# Altium PCB Layout.PcbDoc
Units mil, origin at the board's own origin, x right, y up, seen from the top; angles counter-clockwise.
Board outline 3937.01 x 2362.2 mil, 2 copper layers (Top Layer, Bottom Layer); 106 components, 66 nets, 304 pads, 82 vias.
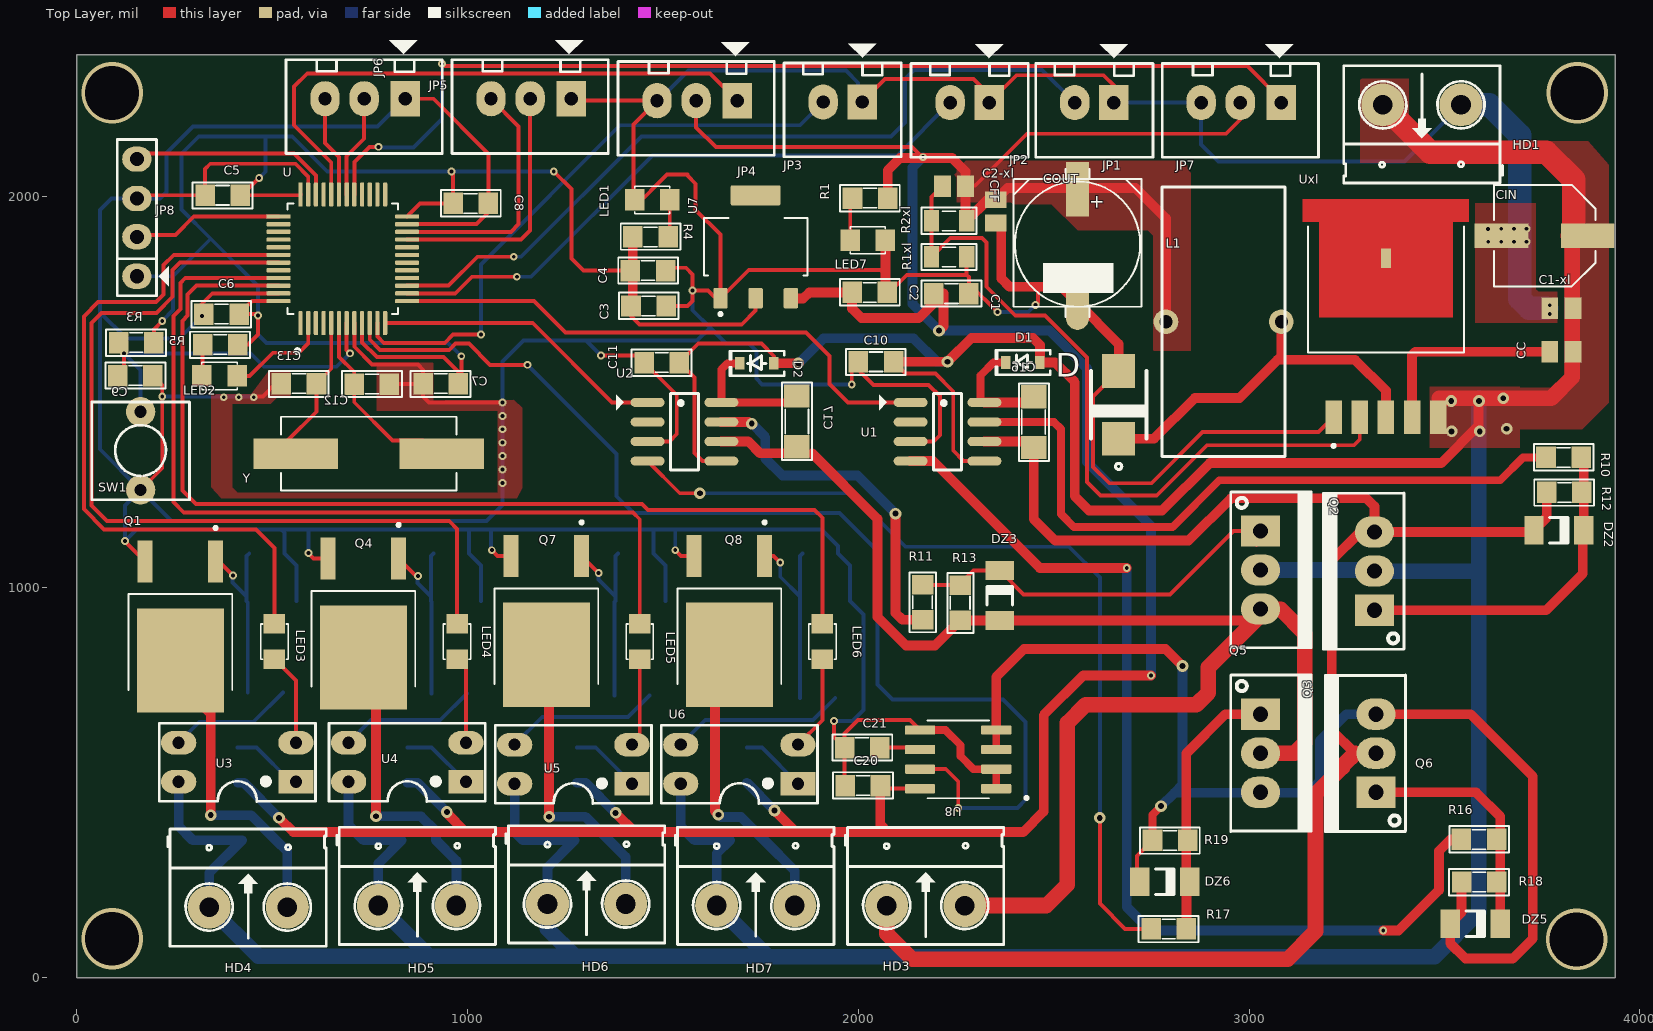
[diagram p0: Top Layer view]
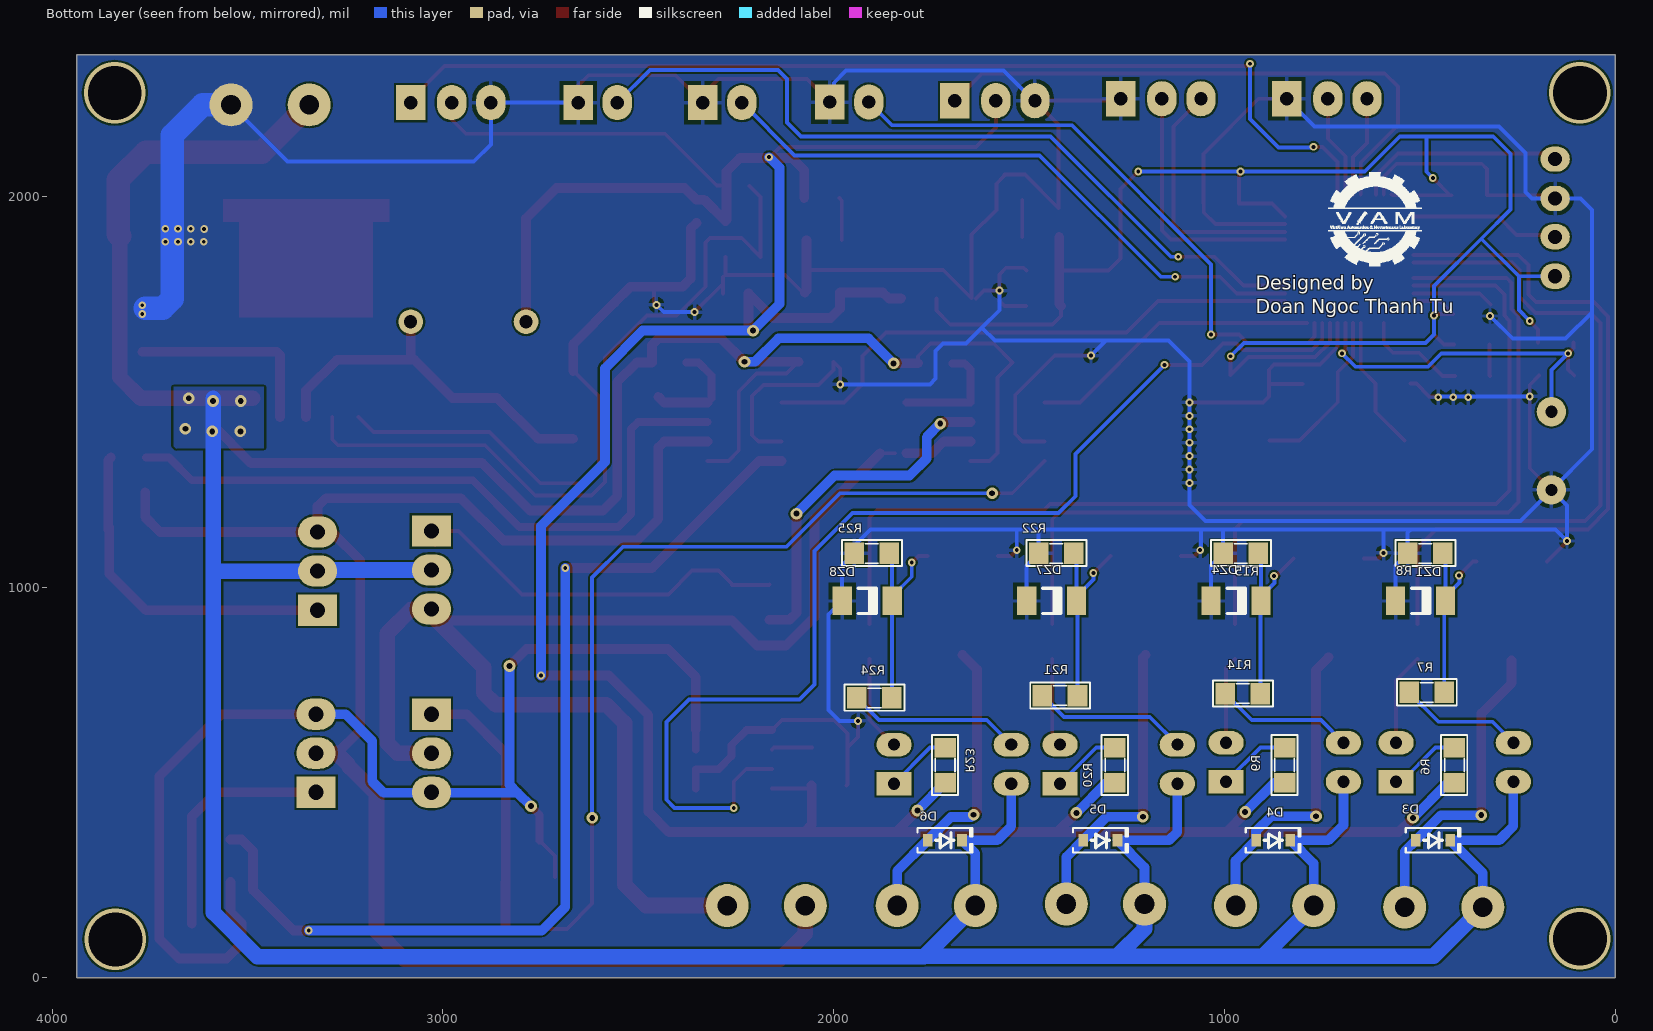
[diagram p1: Bottom Layer view, seen from below]
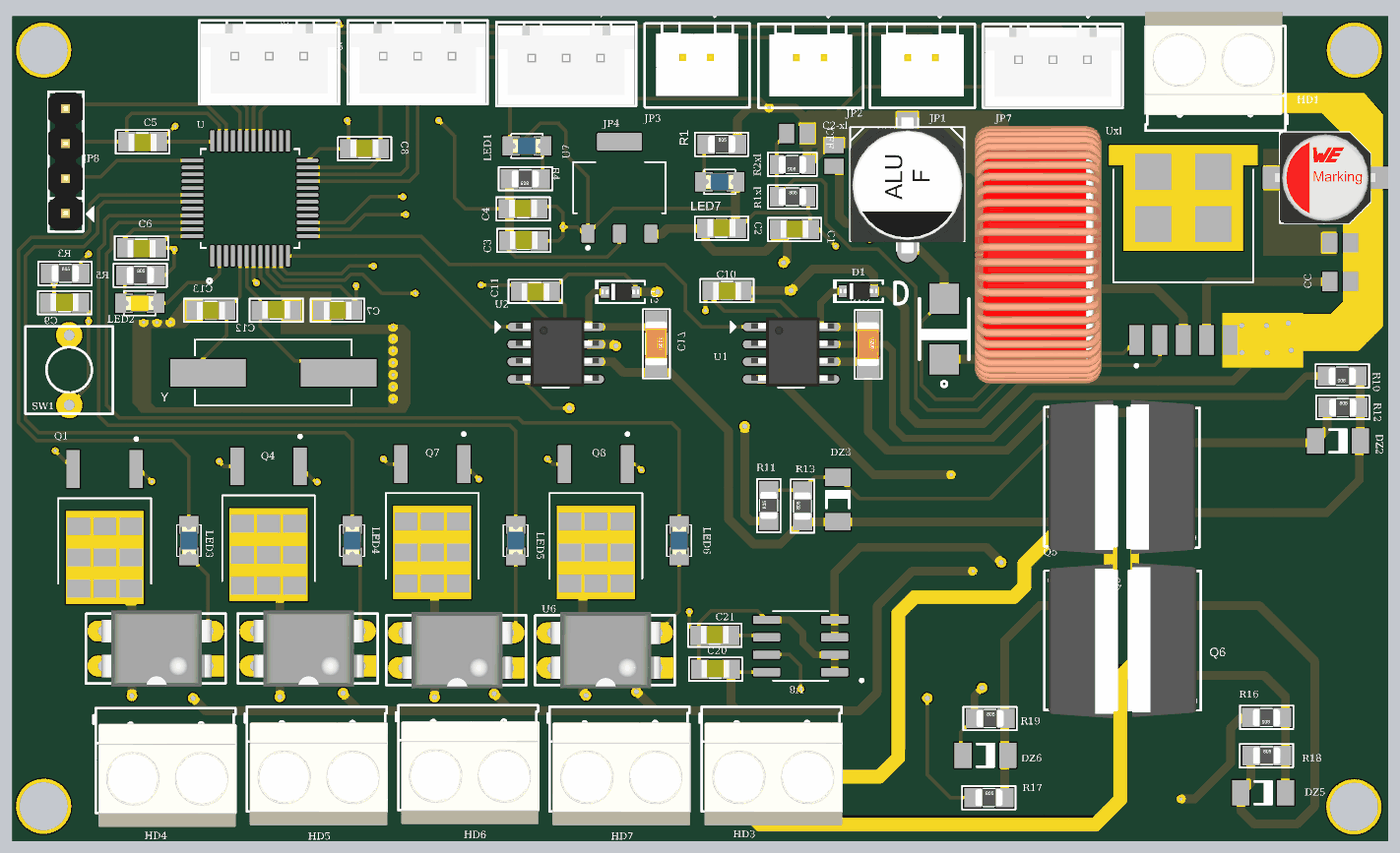
[diagram p2: 3D render of the assembled board from above, using the file's embedded part models]
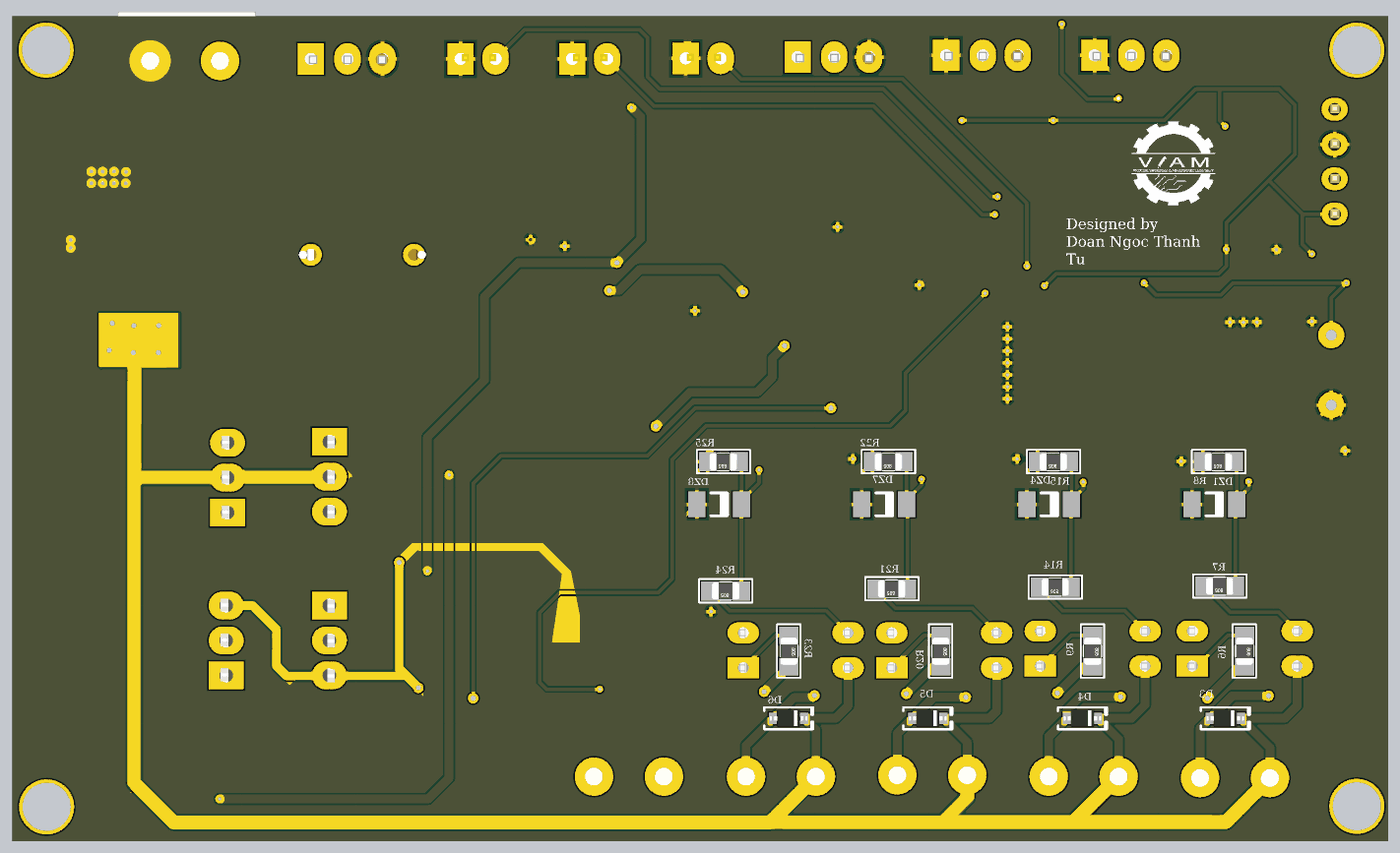
[diagram p3: 3D render of the assembled board from below, using the file's embedded part models]

## Layer stack, top to bottom
Top Solder: solder mask 0.4, Solder Resist, Dk 3.5
Top Layer: signal copper 1.4
Dielectric 1: dielectric 12.6, FR-4, Dk 4.8
Bottom Layer: signal copper 1.4
Bottom Solder: solder mask 0.4, Solder Resist, Dk 3.5

## Board outline
0,0 0,2362.2 3937.01,2362.2 3937.01,0

## Design rules (kind name [scope] priority, off if disabled: settings)
Clearance [All] p1: gap=5 ignorepadtopadclearanceinfootprint=TRUE
DiffPairsRouting [All] p1: maxlimit=10 minlimit=10 mostfreqgap=10 toplayer_minwidth=15 toplayer_maxwidth=15 toplayer_prefwidth=15 bottomlayer_minwidth=15 bottomlayer_maxwidth=15 bottomlayer_prefwidth=15 substack1={FB8EBCBD-66C1-4FBB-A9E1-B06849E95094} toplayer_{fb8ebcbd-66c1-4fbb-a9e1-b06849e95094}_minwidth=15 toplayer_{fb8ebcbd-66c1-4fbb-a9e1-b06849e95094}_maxwidth=15 toplayer_{fb8ebcbd-66c1-4fbb-a9e1-b06849e95094}_prefwidth=15 bottomlayer_{fb8ebcbd-66c1-4fbb-a9e1-b06849e95094}_minwidth=15 bottomlayer_{fb8ebcbd-66c1-4fbb-a9e1-b06849e95094}_maxwidth=15 bottomlayer_{fb8ebcbd-66c1-4fbb-a9e1-b06849e95094}_prefwidth=15 maxuncoupledlength=500
PolygonConnect PolygonConnect_11 [All vs IsNamedPolygon('5V_L01_P040')] p1: connectstyle=Direct reliefconductorwidth=10 reliefentries=4 polygonreliefangle="90 Angle" airgapwidth=10
PolygonConnect PolygonConnect_10 [All vs IsNamedPolygon('12V_L01_P038')] p2: connectstyle=Direct reliefconductorwidth=10 reliefentries=4 polygonreliefangle="90 Angle" airgapwidth=10
PolygonConnect PolygonConnect_9 [All vs IsNamedPolygon('GND_L01_P034')] p3: connectstyle=Direct reliefconductorwidth=10 reliefentries=4 polygonreliefangle="90 Angle" airgapwidth=10
PolygonConnect PolygonConnect_8 [All vs IsNamedPolygon('GND_L01_P030')] p4: connectstyle=Direct reliefconductorwidth=10 reliefentries=4 polygonreliefangle="90 Angle" airgapwidth=10
PolygonConnect PolygonConnect_7 [All vs IsNamedPolygon('GND_L01_P024')] p5: connectstyle=Direct reliefconductorwidth=10 reliefentries=4 polygonreliefangle="90 Angle" airgapwidth=10
PolygonConnect PolygonConnect_6 [All vs IsNamedPolygon('GND_L02_P022')] p6: connectstyle=Direct reliefconductorwidth=10 reliefentries=4 polygonreliefangle="90 Angle" airgapwidth=10
PolygonConnect PolygonConnect_5 [All vs IsNamedPolygon('12V_L01_P020')] p7: connectstyle=Direct reliefconductorwidth=10 reliefentries=4 polygonreliefangle="90 Angle" airgapwidth=10
PolygonConnect PolygonConnect_4 [All vs IsNamedPolygon('12V_L01_P020')] p8: thpad.connectstyle=Direct thpad.reliefconductorwidth=10 thpad.reliefentries=4 thpad.polygonreliefangle="90 Angle" thpad.airgapwidth=10 smdpad.connectstyle=Relief smdpad.reliefconductorwidth=10 smdpad.reliefentries=4 smdpad.polygonreliefangle="90 Angle" smdpad.airgapwidth=10 via.connectstyle=Relief via.reliefconductorwidth=10 via.reliefentries=4 via.polygonreliefangle="90 Angle" via.airgapwidth=10
PolygonConnect PolygonConnect_3 [All vs IsNamedPolygon('12V_L02_P018')] p9: connectstyle=Direct reliefconductorwidth=10 reliefentries=4 polygonreliefangle="90 Angle" airgapwidth=10
PolygonConnect PolygonConnect_2 [All vs IsNamedPolygon('12V_L01_P016')] p10: connectstyle=Direct reliefconductorwidth=10 reliefentries=4 polygonreliefangle="90 Angle" airgapwidth=10
PolygonConnect PolygonConnect_1 [All vs IsNamedPolygon('12V_L02_P014')] p11: thpad.connectstyle=Direct thpad.reliefconductorwidth=10 thpad.reliefentries=4 thpad.polygonreliefangle="90 Angle" thpad.airgapwidth=10 smdpad.connectstyle=Relief smdpad.reliefconductorwidth=10 smdpad.reliefentries=4 smdpad.polygonreliefangle="90 Angle" smdpad.airgapwidth=10 via.connectstyle=Relief via.reliefconductorwidth=10 via.reliefentries=4 via.polygonreliefangle="90 Angle" via.airgapwidth=10
PolygonConnect [All] p12: connectstyle=Relief reliefconductorwidth=10 reliefentries=4 polygonreliefangle="90 Angle" airgapwidth=10
RoutingVias [All] p1: holewidth=28 width=50 viastyle="Through Hole" minholewidth=28 minwidth=50 maxholewidth=28 maxwidth=50
SolderMaskExpansion [All] p1: expansion=4 istentingtop=FALSE
Width [All] p1: maxlimit=60 minlimit=10 preferedwidth=25 substack1={FB8EBCBD-66C1-4FBB-A9E1-B06849E95094} minimp=50.000000 maximp=50.000000 favimp=50.000000
29 further rules are at their usual default settings.

## Classes and differential pairs
component class XL4015: C1-xl C2-xl CC CFF CIN COUT D L1 LED7 R1 R1xl R2xl Uxl
component class Peripheral: C10 C11 C16 C17 C20 C21 D1 D2 D3 D4 D5 D6 DZ1 DZ2 DZ3 DZ4 DZ5 DZ6 DZ7 DZ8 HD3 HD4 HD5 HD6 HD7 JP1 JP2 JP3 JP4 JP5 JP6 JP7 LED3 LED4 LED5 LED6 Q1 Q2 Q3 Q4 Q5 Q6 Q7 Q8 R6 R7 R8 R9 R10 R11 R12 R13 R14 R15 R16 R17 R18 R19 R20 R21 R22 R23 R24 R25 U1 U2 U3 U4 U5 U6 U8
component class Microcontroller: C1 C2 C3 C4 C5 C6 C7 C8 C9 C12 C13 HD1 JP8 LED1 LED2 R3 R4 R5 SW1 U U7 Y

## Components (designator, comment, footprint, x,y, rotation, side; value= is the part's Value field where it differs from the comment)
C1 "10uF" SM-0805 2238.19,1750.96 r180 top value=103
C1-xl "105" C0805 3799.21,1713.58 r0 top value=33p
C2 "100nF" SM-0805 2029.11,1754.3 r180 top value=103
C2-xl "105" C0805 2351.38,1961.95 r90 top value=33p
C3 "10uF" SM-0805 1463.27,1719.49 r180 top value=103
C4 "100nF" SM-0805 1461.62,1810.04 r180 top value=103
C5 "100nF" SM-0805 373.03,2002.95 r0 top value=103
C6 "100nF" SM-0805 370.08,1698.82 r0 top value=103
C7 "100nF" SM-0805 931.14,1520.67 r0 top value=103
C8 "100nF" SM-0805 1007.87,1982.09 r180 top value=103
C9 "100nF" SM-0805 149.61,1541.31 r180 top value=103
C10 "10uF" SM-0805 2045.28,1576.77 r0 top value=103
C11 "10uF" SM-0805 1497.05,1574.81 r0 top value=103
C12 "12pF" SM-0805 754.96,1519.68 r180 top value=103
C13 "12pF" SM-0805 568.31,1520.67 r0 top value=103
C16 "22uF" SM-Cap-1206 2448.82,1487.28 r270 top value=10uF/50V
C17 "22uF" SM-Cap-1206 1842.52,1489.17 r270 top value=10uF/50V
C20 "100nF" SM-0805 2011.81,492.13 r180 top value=0.1uF
C21 "1nF" SM-0805 2009.84,589.29 r180 top value=103
CC "105" C0805 3799.21,1602.36 r0 top value=33p
CFF "33nF" C0805 2245.08,2026.55 r0 top value=33p
CIN "220uF" CAP-ALU-SMD-6.3x7.7x2.2 3756.89,1899.61 r180 top
COUT "330uF/25V" CAP-ALU-SMD-F 2561.02,1877.95 r270 top
D "SS54B" DIOM4336X244N 2666.34,1466.54 r90 top
D1 "FR107" SOD323 2421.01,1574.8 r180 top
D2 "FR107" SOD323 1740.16,1572.68 r180 top
D3 "Diode" SOD323 466.13,352.13 r180 bottom
D4 "Diode" SOD323 875.03,352.13 r180 bottom
D5 "Diode" SOD323 1317.55,352.13 r180 bottom
D6 "Diode" SOD323 1715.46,352.13 r180 bottom
DZ1 "Zener 12V" SOD-80 497.85,964.57 r180 bottom
DZ2 "Zener 1/2W" SOD-80 3793.03,1145.74 r0 top
DZ3 "Zener 1/2W" SOD-80 2362.2,978.35 r90 top
DZ4 "Zener 1/2W" SOD-80 970.03,964.57 r180 bottom
DZ5 "Zener 1/2W" SOD-80 3579.02,138.78 r0 top
DZ6 "Zener 1/2W" SOD-80 2784.45,246.06 r0 top
DZ7 "Zener 1/2W" SOD-80 1442.2,964.57 r180 bottom
DZ8 "Zener 1/2W" SOD-80 1914.37,964.57 r180 bottom
HD1 "Header 2" HED2 3542.52,2234.25 r180 top
HD3 "Header 2" HED2 2072.51,185.04 r0 top
HD4 "Header 2" HED2 338.51,181.1 r0 top
HD5 "Header 2" HED2 771.51,185.08 r0 top
HD6 "Header 2" HED2 1204.51,188.98 r0 top
HD7 "Header 2" HED2 1637.51,185.08 r0 top
JP1 "JP2" CON2 2654.01,2240 r180 top value="Connector 2"
JP2 "JP2" CON2 2335,2240 r180 top value="Connector 2"
JP3 "JP2" CON2 2010,2241.42 r180 top value="Connector 2"
JP4 "JP3" CON3 1685,2245 r180 top value="Connector 3"
JP5 "JP3" CON3 1260,2250 r180 top value="Connector 3"
JP6 "JP3" CON3 835.24,2250 r180 top value="Connector 3"
JP7 "JP3" CON3 3077.6,2240 r180 top value="Connector 3"
JP8 "JP4" JP4 153.54,1895.63 r90 top value="Connector 4"
L1 "47uH/5A" L-DIP-M-18.5x8 2935.04,1679.13 r180 top
LED1 "LED SMD" SM-LED-0805-Blue 1517.4,1990.85 r180 top
LED2 "LED SMD" SM-LED-0805-Yellow 319.88,1540.35 r0 top
LED3 "LED SMD" SM-LED-0805-Blue 505.59,815.67 r90 top
LED4 "LED SMD" SM-LED-0805-Blue 973.09,815.67 r90 top
LED5 "LED SMD" SM-LED-0805-Blue 1440.58,815.67 r90 top
LED6 "LED SMD" SM-LED-0805-Blue 1908.07,815.67 r90 top
LED7 "LED SMD" SM-LED-0805-Blue 1979.33,1887.8 r0 top
Q1 "IPD025N06N" DPAK229P994X241-3N 264.96,899.33 r270 top
Q2 "IRF840" QTO-220 3029.53,1143.7 r270 top
Q3 "IRF840" QTO-220 3320.87,940.94 r90 top
Q4 "IPD025N06N" DPAK229P994X241-3N 733.36,907.2 r270 top
Q5 "IRF840" QTO-220 3029.53,674.8 r270 top
Q6 "IRF840" QTO-220 3324.8,474.8 r90 top
Q7 "IPD025N06N" DPAK229P994X241-3N 1201.76,913.78 r270 top
Q8 "IPD025N06N" DPAK229P994X241-3N 1670.16,913.78 r270 top
R1 "510R" SM-RES-0805 1985.11,1995.66 r0 top value="R1/4W - 1K"
R1xl "3.3k" RES-SMD-0805 2232.19,1845.15 r0 top
R2xl "10k" RES-SMD-0805 2232.19,1937.35 r180 top
R3 "10K" SM-RES-0805 106.85,1625.98 r0 top value="R1/4W - 1K"
R4 "510R" SM-RES-0805 1512.99,1896.49 r180 top value="R1/4W - 1K"
R5 "510R" SM-RES-0805 321.85,1620.56 r0 top value="R1/4W - 1K"
R6 "1k" SM-RES-0805 411.42,589.29 r270 bottom value="R1/4W - 1K"
R7 "10R" SM-RES-0805 437.28,730.32 r0 bottom value="R1/4W - 1K"
R8 "4K7" SM-RES-0805 441.06,1086.46 r0 bottom value="R1/4W - 1K"
R9 "1k" SM-RES-0805 845.81,589.29 r270 bottom value="R1/4W - 1K"
R10 "10R" SM-RES-0805 3850.12,1331.76 r180 top value="R1/4W - 1K"
R11 "10R" SM-RES-0805 2164.37,916.42 r90 top value="R1/4W - 1K"
R12 "4K7" SM-RES-0805 3762.09,1242.19 r0 top value="R1/4W - 1K"
R13 "4K7" SM-RES-0805 2260.83,914.92 r90 top value="R1/4W - 1K"
R14 "10R" SM-RES-0805 908.03,727.36 r0 bottom value="R1/4W - 1K"
R15 "4K7" SM-RES-0805 913.23,1086.46 r0 bottom value="R1/4W - 1K"
R16 "10R" SM-RES-0805 3633.59,354.34 r180 top value="R1/4W - 1K"
R17 "10R" SM-RES-0805 2749.57,125 r0 top value="R1/4W - 1K"
R18 "4K7" SM-RES-0805 3544.14,245.24 r0 top value="R1/4W - 1K"
R19 "4K7" SM-RES-0805 2752.95,351.59 r0 top value="R1/4W - 1K"
R20 "1k" SM-RES-0805 1280.19,589.29 r270 bottom value="R1/4W - 1K"
R21 "10R" SM-RES-0805 1375.98,722.44 r0 bottom value="R1/4W - 1K"
R22 "4K7" SM-RES-0805 1385.41,1086.46 r0 bottom value="R1/4W - 1K"
R23 "1k" SM-RES-0805 1714.57,589.29 r270 bottom value="R1/4W - 1K"
R24 "10R" SM-RES-0805 1850.94,716.54 r0 bottom value="R1/4W - 1K"
R25 "4K7" SM-RES-0805 1857.58,1086.46 r0 bottom value="R1/4W - 1K"
SW1 "SW" SW2 163.11,1448.82 r270 top value="SW chip 2 pin"
U "STM32F103C8T6" QFP50P900X900X160-48N 680.63,1840.35 r90 top
U1 "IR2184" SO-8 2228.35,1397.64 r0 top
U2 "IR2184" SO-8 1555.12,1397.64 r0 top
U3 "OPTO" DIP4/W0.3 560.51,501.77 r90 top
U4 "OPTO" DIP4/W0.3 995.51,501.77 r90 top
U5 "OPTO" DIP4/W0.3 1420.51,496.77 r90 top
U6 "OPTO" DIP4/W0.3 1845.51,496.77 r90 top
U7 "AMS1117-3.3" SOT229P700X180-4N 1737.2,1871.06 r0 top
U8 "ACS712ELCTR-05B-T" SOIC127P600X175-8N 2255.51,559.06 r180 top
Uxl "XL4015" CONV_XL4015 3350.39,1841.9 r90 top
Y "8 MHz" XTAL_ECS-120.003-18-5P-TR 747.05,1341.54 r180 top

## Footprints (in the part's own frame and the unit in brackets; to place one, negate y for a bottom-side part, rotate by r counter-clockwise, add the part's x,y. Pads: shape width x height; smd on the part's side, far side on the other; paste and mask are expansions set on the pad)
C0805 [mm] "Chip Capacitor, Body 2.0x1.3mm, IPC High Density"
  rect 1.1x1.4 smd: 1(-0.75,0) 2(0.75,0)
  body extent -1.1,-0.72 1.1,0.72, height 1.4
CAP-ALU-SMD-6.3x7.7x2.2 [mm]
  rect 3.5x1.6 smd: 1(-2.8,0) 2(2.8,0)
  silkscreen extent -3.3,-3.3 3.3,3.3, body extent -3.65,-3.3 3.65,3.3, height 7.65
CAP-ALU-SMD-F [mil]
  rect 140x59.06 smd: 1(-140,0)
  oval 140x59.06 smd: 2(150,0)
  silkscreen extent -192,-163 187,163, body extent -195,-163 195,163, height 402
CON2 [mil] "CON2"
  rect 75x90 hole 34: 1(0,0)
  oval 75x90 hole 34: 2(100,0)
  silkscreen extent -100,-150 200,140, body extent -68,-70 168,107, height 236
CON3 [mil] "CON 3"
  rect 75x90 hole 34: 1(-5,0)
  oval 75x90 hole 34: 2(100,0) 3(200,0)
  silkscreen extent -100,-150 300,140, body extent -95,-90 295,136, height 276
CONV_XL4015 [mm]
  rect 2.16x1.07 smd: 1(-10.335,3.4) 2(-10.335,1.7) 3(-10.335,0) 4(-10.335,-1.7) 5(-10.335,-3.4)
  rect 1.27x0.635 smd paste-2 mask+0: 3.1(0,0)
  Top Layer region: 3.835,-5.4 2.365,-5.4 2.365,-4.35 -3.835,-4.35 -3.835,4.35 2.365,4.35 2.365,5.4 3.835,5.4
  silkscreen extent -12.3,-5.08 2.05,5.08
DIOM4336X244N [mm]
  rect 2.2x2.15 smd: A(2.2,0) C(-2.2,0)
  silkscreen extent -4.2,-1.8 2.2,1.8
DIP4/W0.3 [mil] "4 PIN, W 300mil, Pin to pin 100mil"
  rect 60x90 hole 31: 1(0,0)
  oval 60x90 hole 31: 2(100,0) 3(100,300) 4(0,300)
  silkscreen extent -50,-50 150,350, body extent -59,-10 159,305, height 170
DPAK229P994X241-3N [mm]
  rect 2.74x0.97 smd: 1(-4.22,2.29) 3(-4.22,-2.29)
  rect 6.77x5.67 smd paste-4: TAB(2.21,0)
  silkscreen extent -6.5,-3.37 4.12,3.37
HED2 [mil] "Header 2, 2 pin, hight 300mil, Pin to Pin 200, Colour Green"
  round 110 hole 50: 1(0,0) 2(200,0)
  silkscreen extent -106,-100 300,200, body extent -92,-140 302,155, height 394
JP4 [mil] "Jumper 4"
  oval 65x75 hole 36: 1(-100,0) 2(1,0) 3(99,0) 4(200,0)
  silkscreen extent -150,-81 250,50, body extent -148,-48 248,50, height 323
L-DIP-M-18.5x8 [mm] "Body 17.5x8mm, 2 leads"
  round 1.6 hole 0.85: 1(-3.75,0) 2(3.75,0)
  silkscreen extent -4,-8.75 4,8.75, body extent -4.62,-9.37 4.62,9.37, height 19.35
QFP50P900X900X160-48N [mm]
  rrect50% 1.56x0.28 smd: 1(-4.18,2.75) 2(-4.18,2.25) 3(-4.18,1.75) 4(-4.18,1.25) 5(-4.18,0.75) 6(-4.18,0.25) 7(-4.18,-0.25) 8(-4.18,-0.75) 9(-4.18,-1.25) 10(-4.18,-1.75) 11(-4.18,-2.25) 12(-4.18,-2.75) 25(4.18,-2.75) 26(4.18,-2.25) 27(4.18,-1.75) 28(4.18,-1.25) 29(4.18,-0.75) 30(4.18,-0.25) 31(4.18,0.25) 32(4.18,0.75) 33(4.18,1.25) 34(4.18,1.75) 35(4.18,2.25) 36(4.18,2.75)
  rrect50% 0.28x1.56 smd: 13(-2.75,-4.18) 14(-2.25,-4.18) 15(-1.75,-4.18) 16(-1.25,-4.18) 17(-0.75,-4.18) 18(-0.25,-4.18) 19(0.25,-4.18) 20(0.75,-4.18) 21(1.25,-4.18) 22(1.75,-4.18) 23(2.25,-4.18) 24(2.75,-4.18) 37(2.75,4.18) 38(2.25,4.18) 39(1.75,4.18) 40(1.25,4.18) 41(0.75,4.18) 42(0.25,4.18) 43(-0.25,4.18) 44(-0.75,4.18) 45(-1.25,4.18) 46(-1.75,4.18) 47(-2.25,4.18) 48(-2.75,4.18)
  silkscreen extent -6.15,-3.6 3.6,3.6
QTO-220 [mil] "TO-220 - 1-2-3"
  rect 80x100 hole 39: 1(0,0)
  oval 80x100 hole 39: 2(100,0) 3(200,0)
  silkscreen extent -100,-76 300,130, body extent -119,-64 322,121, height 755
RES-SMD-0805 [mil]
  rect 39.37x55 smd: 1(-45,0) 2(45,0)
  silkscreen extent -70,-34 70,33, body extent -39,-25 39,25, height 31
SM-0805 [mil] "Compoment SMD 80x50mil"
  rect 50x55 smd: 1(-45,0) 2(45,0)
  silkscreen extent -77,-34 76,33, body extent -40,-27 40,23, height 24
SM-Cap-1206 [mil]
  rect 60x65 smd: 1(0,0) 2(130,0)
  silkscreen extent -34,-38 164,39, body extent 1,-31 127,31, height 40
SM-LED-0805-Blue [mil]
  rect 50x55 smd: 1(0,0) 2(90,0)
  silkscreen extent 0,-35 90,35, body extent 5,-25 85,25, height 43
SM-LED-0805-Yellow [mil]
  rect 50x55 smd: 1(0,0) 2(90,0)
  silkscreen extent 0,-35 90,35, body extent 5,-25 85,25, height 43
SM-RES-0805 [mil]
  rect 50x55 smd: 1(0,0) 2(90,0)
  silkscreen extent -32,-34 121,33, body extent 6,-25 84,25, height 31
SO-8 [mm] "8-Pin Small Outline Integrated Circuit 1.27 mm Pitch, IPC Medium Density"
  oval 2.2x0.6 smd: 1(-2.4,1.905) 2(-2.4,0.635) 3(-2.4,-0.635) 4(-2.4,-1.905) 5(2.4,-1.905) 6(2.4,-0.635) 7(2.4,0.635) 8(2.4,1.905)
  silkscreen extent -4.44,-2.5 0.9,2.5, body extent -2.89,-2.43 3.15,2.59, height 1.6
SOD323 [mm]
  rect 0.625x0.83 smd: 1(-1.112,0) 2(1.112,0)
  silkscreen extent -1.78,-0.8 1.78,0.8, body extent -1.36,-0.62 1.36,0.62, height 1.05
SOD-80 [mm] "MELF Diode, 2-Leads, Body 3.50x1.65mm, IPC Medium Density"
  rect 1.25x1.85 smd: 1(-1.625,0) 2(1.625,0)
  silkscreen extent -0.6,-0.82 0.6,0.83, body extent -1.85,-0.85 1.85,0.85, height 1.69
SOIC127P600X175-8N [mm]
  rrect25% 1.97x0.6 smd: 1(-2.475,1.905) 2(-2.475,0.635) 3(-2.475,-0.635) 4(-2.475,-1.905) 5(2.475,-1.905) 6(2.475,-0.635) 7(2.475,0.635) 8(2.475,1.905)
  silkscreen extent -4.54,-2.52 2,2.6
SOT229P700X180-4N [mm]
  rrect15% 0.93x1.31 smd: 1(-2.29,-3.345) 2(0,-3.345) 3(2.29,-3.345)
  rrect15% 3.24x1.31 smd: 4(0,3.345)
  silkscreen extent -3.36,-4.47 3.36,1.86
SW2 [mil] "SW button 2pin, 250x 250 mil"
  round 75 hole 31: 1(0,0) 2(200,0)
  silkscreen extent -25,-125 225,125
XTAL_ECS-120.003-18-5P-TR [mm]
  rect 5.5x2 smd: 1(-4.75,0) 2(4.75,0)
  silkscreen extent -5.7,-2.4 5.7,2.4

## Part data
C1 C2 C3 C4 C5 C6 C7 C8 C9 C10 C11 C12 C13 C21: library part CM, "Cap SMD"
C1-xl C2-xl CC CFF: library part CapSMD, "Capacitor", LatestRevisionDate=17-Jul-2002, LatestRevisionNote="Re-released for DXP Platform.", PackageReference=RAD-0.3, Published=8-Jun-2000, Publisher="Altium Limited"
C16 C17: library part CP1, "Cap P  0,1uF < 22uF , 16 - 50V", Description 1="10 => 220uF/6,3V/10V - 10uF => 100uF/16V", Description 2="0,1uF => 33uF/50V - 10uF => 22uF/63V", Description 3="0,47uF => 10uF/100V"
C20: library part CN2, "Cap np 104 => 105pF"
CIN COUT: library part CN-ALU-SMD, "Polarized Capacitor (Axial)", LatestRevisionDate=17-Jul-2002, LatestRevisionNote="Re-released for DXP Platform.", PackageReference=POLAR0.8, Published=8-Jun-2000, Publisher="Altium Limited"
D: "Diode Schottky 40V 5A Surface Mount SMBF", Package=None, Availability=Unavailable, MF=JCET, MP=SS54B, Price=None, SnapEDA_Link=https://www.snapeda.com/parts/SS54B/JCET/view-part/105689/?ref=snap
D1 D2 D3 D4 D5 D6: library part "Diode SMD"
DZ1 DZ2 DZ3 DZ4 DZ5 DZ6 DZ7 DZ8: library part "Zener SMD"
HD1 HD3 HD4 HD5 HD6 HD7: library part Hed2, "Header 2 (Green)"
JP1 JP2 JP3: library part Con2, "Connector 2"
JP4 JP5 JP6 JP7: library part Con3, "Connector 3"
JP8: library part Con4, "Connector 4"
L1: library part L-SMD-1, Inductance="1.0 μH", Manufacturer="Wurth Elektronik", partNo=78477010, ComponentLink1Description=Manufacturer, ComponentLink1URL=http://www.we-online.de, ComponentLink2Description=Datasheet, ComponentLink2URL=http://katalog.we-online.de/pbs/datasheet/78477010.pdf, Created by="Baojun Chen", Created Date=Nov.2015
LED1 LED2 LED3 LED4 LED5 LED6 LED7: library part LED-SMD-0805
Q1 Q4 Q7 Q8: "N-Channel 60V 90A _Tc_ 3W _Ta_, 167W _Tc_ Surface Mount PG-TO252-3", Package="TO-252-3 Infineon Technologies", Availability=Unavailable, MF="Infineon Technologies", MP=IPD025N06N, Price=None, SnapEDA_Link=https://www.snapeda.com/parts/IPD025N06N/Infineon%20Technologies/view-part/666018/?ref=snap
Q2 Q3 Q5 Q6: "MOSFET N - CHANNEL 500V - 0.75 - 8A - TO-220"
R1 R3 R4 R5 R6 R7 R8 R9 R10 R11 R12 R13 R14 R15 R16 R17 R18 R19 R20 R21 R22 R23 R24 R25: library part R, "Resistor 1/4W"
R1xl R2xl: library part Res-SMD, "Resistor", Manufacturer="Generic Components", Class=Passive, Published=08/06/2000, Publisher="Altium Hobart Technology Centre"
SW1: library part SW2, "Switch button 2 pin"
U: "ARMÂ® CortexÂ®-M3 STM32F1 Microcontroller IC 32-Bit 72MHz 64KB _64K x 8_ FLASH", Package="LQFP-48 STMicroelectronics", Availability=Unavailable, MF=STMicroelectronics, MP=STM32F103C8T6, Price=None, SnapEDA_Link=https://www.snapeda.com/parts/STM32F103C8T6/STMicroelectronics/view-part/52195/?ref=snap
U1 U2: "Half-Bridge Driver"
U7: "Sot223/Pkg 1-Amp 3.3-Volt Low Drop Out Voltage Regulatator", Package=None, Availability=Unavailable, MF="Advanced Monolithic Systems", MP=AMS1117-3.3, Price=None, SnapEDA_Link=https://www.snapeda.com/parts/AMS1117-3.3/Advanced%20Monolithic%20Systems/view-part/53450/?ref=snap
U8: "Current Sensor 5A 1 Channel Hall Effect, Open Loop Bidirectional 8-SOIC _0.154, 3.90mm Width_", Package="SOIC-8 Allegro MicroSystems LLC", Digi-Key_Part_Number=620-1189-1-ND, Digi-Key_Purchase_URL=https://www.digikey.in/product-detail/en/allegro-microsystems/ACS712ELCTR-05B-T/620-1189-1-ND/1284606?utm_source=snapeda&utm_medium=aggregator&utm_campaign=symbol, MF="Allegro MicroSystems LLC", MP=ACS712ELCTR-05B-T, SnapEDA_Link=https://www.snapeda.com/parts/ACS712ELCTR-05B-T/Allegro%20MicroSystems%20LLC/view-part/46765/?ref=snap
Uxl: "5A 180KHz 36V Buck DC to DC Converter", Package=Package, Availability=Unavailable, MF=XLSEMI, MP=XL4015, Price=None, SnapEDA_Link=https://www.snapeda.com/parts/XL4015/XLSEMI/view-part/4725363/?ref=snap
Y: library part ECS-120.003-18-5P-TR, Package="HC49/US ECS International", Availability=Unavailable, MF="ECS International", MP=ECS-120.003-18-5P-TR, Price=None, SnapEDA_Link=https://www.snapeda.com/parts/ECS-120.003-18-5P-TR/ECS%20International/view-part/2547635/?ref=snap

## Via types
v1: diameter 20, hole 10, Top Layer to Bottom Layer, 55 vias
v2: diameter 30, hole 15, Top Layer to Bottom Layer, 23 vias
v3: diameter 157.48, hole 137.8, Top Layer to Bottom Layer, 4 vias

## Nets (pads, with @x,y where several pads share a name; then routed paths per layer and width w, separated by ;. In a path a pad name is that pad's centre, name@x,y a point inside that pad or via, vN(x,y) a via of type N, cw(c..) or ccw(c..) an arc to the next point about the centre after c; other vN are vias at no path point)
3V3: C3.2 C4.2 C5.2 C6.2 C7.2 C8.2 JP8.1 R3.2 R4.2 R5.2 U7.2 U.9 U.24 U.36 U.48 | length 4706.3
  Top Layer w10: R3.2 196.85,1659.84 v1(218.5,1681.5) ; R5.2 437.91,1620.56 463.58,1646.23 v1(463.58,1694.88) 459.65,1698.82 C6.2 448.35,1732.09 U.48 ; C5.2 C5.2@422.24,2002.95 ; v1(466.54,2047.24) C5.2@422.24,2002.95 ; U.36 570.39,2002.95 C5.2@422.24,2002.95 ; U.9 729.84,1626.46 767.72,1588.58 938.7,1588.58 983.98,1543.31 v1(983.98,1590.83) ; U.24 878.66,1982.09 C8.2 962.87,2059.76 v1(958.66,2063.98) ; v1(1220.47,2063.98) 1265.75,2018.7 1265.75,1840.55 1296.26,1810.04 C4.2 ; C3.2 1418.27,1693.94 1439.96,1672.24 1701.77,1672.24 1737.2,1707.68 U7.2
  Top Layer w25: C3.2 1422.99,1724.21 R4.2
  Bottom Layer w10: JP8.1 246.42,1795.63 ; v1(218.5,1681.5) 246.42,1709.41 246.42,1795.63 ; v1(466.54,2047.24) 482.28,2062.99 482.28,2153.54 ; v1(983.98,1590.83) 949.8,1625 484.81,1625 463.58,1646.23 v1(463.58,1694.88) 463.58,1770.67 342.52,1891.73 ; v1(1220.47,2063.98) v1(958.66,2063.98) 640.75,2063.98 551.18,2153.54 482.28,2153.54 ; 246.42,1795.63 342.52,1891.73 ; 342.52,1891.73 267.72,1966.54 267.72,2109.25 312.01,2153.54 482.28,2153.54
5V: C1.2 C2-xl.2 C2.2 C20.1 CFF.2 COUT.1 JP4.2 JP7.2 L1.2 R1.2 R2xl.1 R6.2 R9.2 R20.2 R23.2 U7.3 U8.8 | length 8610.5
  Top Layer w10: JP4.2 1585,2176.81 1635.83,2125.98 2137.8,2125.98 v1@2165.35,2098.43 ; C20.1 2064.88,484.06 U8.8 ; CFF.2 2275.62,2027.56 2299.21,2027.56 2432.09,2160.43 2940.91,2160.43 2977.6,2197.12 JP7.2
  Top Layer w25: v2(517.54,409.45) 553.96,373.03 995.08,373.03 ; v2(946.85,424.21) 946.85,421.26 995.08,373.03 ; v2(1378.94,422.24) 1428.15,373.03 ; v2(1785.72,428.15) 1840.83,373.03 ; U7.3 1828.35,1738.39 1858.66,1738.39 1874.58,1754.3 C2.2 1984.11,1712.74 2007.87,1688.98 2154.8,1688.98 2217.8,1751.97 2217.8,1667.6 v2(2206.69,1656.5) ; C20.1 2056.1,491.42 2056.1,391.73 2074.8,373.03 ; R1.2 2075.11,2066.52 2107.01,2098.43 2165.35,2098.43 2240.16,2098.43 2274.61,2063.97 CFF.2 2274.61,1939.94 R2xl.1 2331.32,1991.48 C2-xl.2 2381.55,2021.65 2709.65,2021.65 2787.4,1943.9 L1.2 ; v1(2749.02,773.62) 2575.79,773.62 2474.41,672.24 2474.41,425.2 2422.24,373.03 2074.8,373.03 ; 995.08,373.03 1428.15,373.03 ; 1428.15,373.03 1840.83,373.03 ; 1840.83,373.03 2074.8,373.03
  Bottom Layer w25: R6.2 427.69,499.29 v2(517.54,409.45) ; R9.2 871.77,499.29 v2(946.85,424.21) ; R20.2 1301.89,499.29 v2(1378.94,422.24) ; R23.2 v2(1785.72,428.15) ; v1(2165.35,2100.39) 2138.78,2073.82 2138.78,1724.41 v2(2206.69,1656.5) 2489.02,1656.5 2585.63,1559.88 2585.63,1319.88 2749.02,1156.5 v1(2749.02,773.62)
12V: C1-xl.2 C10.2 C11.2 CC.2 CIN.1 D1.1 D2.1 D3.2 D4.2 D5.2 D6.2 HD1.2 HD4.1 HD5.1 HD6.1 HD7.1 Q2.2 Q3.2 U1.5 U2.5 U3.4 U4.4 U5.4 U6.4 Uxl.5 | length 12656
  Top Layer w10: U2.5 1601.38,1322.64 1580.71,1343.31 1580.71,1536.14 C11.2 1590.27,1623.03 1751.81,1623.03 1783.96,1590.89 D2.1 ; C10.2 2120.79,1546.26 2197.83,1546.26 2243.11,1500.98 2243.11,1349.16 2269.63,1322.64 U1.5
  Top Layer w25: D2.1 v2(1846.61,1572.68) ; C10.2 v2(2228.5,1576.77) 2289.53,1637.8 2446.85,1637.8 2464.81,1619.84 D1.1 2503.94,1574.8 2554.13,1524.61 2554.13,1232.28 2590.55,1195.87 2777.56,1195.87 2899.61,1317.91 3492.13,1317.91 3587.6,1413.39 v2@3587.6,1483.27
  Top Layer w40: 3487.6,1483.27 3587.6,1483.27 v2(3650.59,1483.27) 3773.62,1483.27 3827.76,1537.4 CIN.1@3827.76,1899.61
  Top Layer w60: HD1.2 3463.58,2113.19 3760.83,2113.19 3831.69,2042.32 3831.69,1903.54 CIN.1@3827.76,1899.61
  Bottom Layer w25: U3.4 260.51,388.11 296.5,352.13 D3.2 338.51,268.3 HD4.1 ; U4.4 695.51,390.75 734.14,352.13 D4.2 771.51,292.41 HD5.1 ; U5.4 1120.51,372.97 1141.36,352.13 D5.2 1204.51,282.89 HD6.1 ; U6.4 1545.51,387.79 1581.18,352.13 D6.2 1637.51,317.97 HD7.1 ; v2(1846.61,1572.68) 1910.75,1636.81 2141.57,1636.81 2201.61,1576.77 v2(2228.5,1576.77)
  Bottom Layer w40: HD4.1 464.5,55.12 901.47,55.12 ; HD5.1 901.47,55.12 ; HD6.1 1204.51,125.21 1274.61,55.12 ; HD7.1 1767.47,55.12 ; Q2.2 3318.11,1043.7 Q3.2 3587.2,1040.94 3587.6,1041.34 ; v2@3587.6,1483.27 3587.6,1041.34 ; 901.47,55.12 1274.61,55.12 ; 1274.61,55.12 1767.47,55.12 ; 1767.47,55.12 1768.46,54.13 3474.68,54.13 3587.6,167.05 3587.6,1041.34
  other v2: 3518.7,1398.62 3590.55,1398.62 3659.45,1405.48 3517.78,1476.38 3588.7,1476.38
GND: C1-xl.1 C1.1 C2-xl.1 C2.1 C3.1 C4.1 C5.1 C6.1 C7.1 C8.1 C9.1 C10.1 C11.1 C12.1 C13.1 C20.2 C21.2 CIN.2 COUT.2 D.A DZ1.1 DZ4.1 DZ7.1 DZ8.1 HD1.1 JP1.1 JP2.1 JP3.1 JP4.3 JP5.1 JP6.1 JP7.3 JP8.3 LED1.2 LED7.2 Q1.3 Q4.3 Q7.3 Q8.3 R1xl.2 R8.2 R15.2 R22.2 R25.2 SW1.2 U1.3 U2.3 U7.1 U8.1 U8.2 U8.5 U.8 U.23 U.35 U.47 Uxl.1 | length 19680.1
  Top Layer w10: v1(123.03,1118.11) 123.03,1117.25 Q1.3 ; JP8.3 161.87,2002.95 C5.1 328.03,2070.43 341.26,2083.66 559.06,2083.66 592.04,2050.67 U.35 ; SW1.2 218.5,1304.21 v1(218.5,1488.19) 218.5,1517.42 C9.1 ; C6.1@318.19,1723.43 346.54,1751.77 U.47 ; v1@452.76,1488.19 476.38,1488.19 508.86,1520.67 C13.1 ; v1@592.52,1086.61 605.79,1073.35 Q4.3 ; U.8 710.15,1615.22 755.76,1569.61 872.87,1569.61 886.14,1556.34 C7.1 ; C12.1 885.16,1519.68 C7.1 ; JP6.1 912.4,2250 1053.78,2108.62 1053.78,1982.99 C8.1 1052.87,1958.66 1023.15,1928.94 U.23 ; v1(1062.01,1094.49) 1076.57,1079.92 Q7.3 ; v1@1087.8,1472.64 901.38,1472.64 886.14,1487.87 C7.1 ; JP5.1 1270,2245 JP4.3 1424.21,2184.21 1424.21,1969.63 1510.69,2056.1 1562.99,2056.1 1562.99,2053.15 1583.66,2032.48 1583.66,1965.55 1647.05,1902.17 U7.1 1719.68,1812.01 2056.76,1812.01 2069.33,1799.44 ; v1(1341.54,1592.52) 1434.33,1592.52 C11.1 1535.43,1491.42 1535.43,1391.73 1516.34,1372.64 U2.3 ; C4.1 1513.98,1817.41 1558.82,1817.41 1575.79,1800.44 v1(1575.79,1758.86) ; C3.1 1562.48,1719.49 1575.79,1732.8 v1(1575.79,1758.86) ; v1(1531.5,1094.49) 1546.06,1079.92 Q8.3 ; U7.1@1635.55,1738.39 1615.08,1758.86 v1(1575.79,1758.86) ; v1(1937.51,657.48) 1937.51,616.62 C21.2 ; C20.2 1964.84,494.09 C21.2 ; v1(1983.27,1518.7) 1983.27,1559.76 C10.1 2000.28,1555.83 2038.39,1517.72 2180.12,1517.72 2208.66,1489.17 2208.66,1388.78 2192.52,1372.64 U1.3 ; JP3.1 2068.78,2300.2 2294.8,2300.2 2335,2260 JP2.1 2405,2310 2627.99,2310 2654.01,2283.98 JP1.1 ; C2.1 2079.11,1754.3 2124.02,1799.21 2277.19,1799.21 ; U8.5 2132.68,659.45 1999.02,659.45 1964.84,625.28 C21.2 ; R1xl.2 2277.19,1799.21 ; C1.1 2283.19,1793.21 2277.19,1799.21 ; C1.1@2285.83,1773.94 v1(2356.02,1703.74) ; v1(2453.74,1722.44) 2459.65,1728.35 2459.65,1768.7 ; D.A 2600.63,1487.44 2600.63,1307.83 2642.72,1265.75 2750,1265.75 2880.91,1396.65 3178.18,1396.65 Uxl.1
  Top Layer w20: U8.5 2223.23,634.06 2261.81,595.47 2261.81,566.93 2294.68,534.06 U8.2 U8.1
  Top Layer w25: LED7.2 2069.33,1799.44 2069.33,1759.08 C2.1 ; C2-xl.1 2366.14,1917.66 2366.14,1789.37 2386.81,1768.7 2459.65,1768.7 2520.28,1768.7 COUT.2 2666.34,1622.64 D.A
  Bottom Layer w10: v1(218.5,1488.19) v1@452.76,1488.19 ; v1(320.16,1693.9) 262.09,1635.83 126.57,1635.83 59.06,1703.35 ; DZ1.1 561.83,1055.69 R8.2 531.06,1139.21 522.64,1147.64 ; v1(592.52,1087.6) 592.52,1147.64 ; JP6.1 769.54,2179.29 297.4,2179.29 229.33,2111.22 229.33,2011.17 212.8,1994.63 JP8.3 88.92,1994.63 59.06,1964.76 59.06,1703.35 ; DZ4.1 1034,1055.69 R15.2 1003.23,1144.97 1005.91,1147.64 ; v1(1062.01,1094.49) 1060.04,1096.46 1060.04,1147.64 ; v1(1341.54,1592.52) 1303.15,1630.91 ; JP4.3 1488.11,2245 1564.96,2321.85 1968.5,2321.85 1999.57,2290.79 1999.57,2251.85 JP3.1 ; DZ7.1 1506.17,1055.69 R22.2 1475.41,1146.67 1476.38,1147.64 ; v1(1531.5,1094.49) 1531.5,1147.64 ; v1(1575.79,1758.86) 1575.79,1708.66 1620,1664.45 ; v1(1937.51,657.48) 1985.24,657.48 2012.8,685.04 2012.8,930.12 DZ8.1 1978.35,1055.69 R25.2 1947.58,1105.57 1905.51,1147.64 1531.5,1147.64 ; v1(1983.27,1518.7) 1753.94,1518.7 1739.17,1533.46 1739.17,1604.33 1720.47,1623.03 1661.42,1623.03 1620,1664.45 ; v1(2356.02,1703.74) 2435.04,1703.74 v1(2453.74,1722.44) ; JP1.1 JP7.3 2877.6,2133.23 2921.26,2089.57 3397.83,2089.57 HD1.1 ; 59.06,1703.35 59.06,1352.87 SW1.2 ; SW1.2 242.64,1169.29 1048.23,1169.29 1089.57,1210.63 v1(1089.57,1266.73) v1(1089.57,1301.05) v1(1089.57,1335.37) v1(1089.57,1369.68) v1(1089.57,1404) v1(1089.57,1438.32) v1(1089.57,1472.64) 1089.57,1577.76 1142.72,1630.91 1303.15,1630.91 ; SW1.2 123.03,1208.74 v1(123.03,1118.11) 152.56,1147.64 522.64,1147.64 ; 522.64,1147.64 592.52,1147.64 ; 592.52,1147.64 1005.91,1147.64 ; 1005.91,1147.64 1060.04,1147.64 ; 1060.04,1147.64 1476.38,1147.64 ; 1303.15,1630.91 1587.6,1630.91 1620,1663.31 1620,1664.45 ; 1476.38,1147.64 1531.5,1147.64
  Bottom Layer w60: HD1.1 3615.16,2234.25 3692.91,2156.5 3692.91,1737.76 3717.09,1713.58 3761.81,1713.58
  other v1: 375.98,1485.95 414.37,1485.95 452.76,1485.95 3769.69,1698.82 3769.69,1721.46 3612.2,1883.86 3645.67,1883.86 3678.15,1883.86 3710.63,1883.86 3611.22,1916.34 3645.67,1917.32 3678.15,1917.32 3710.63,1917.32
GND_MOTOR: DZ5.1 DZ6.1 Q5.3 Q6.3 R18.1 R19.1 U8.3 U8.4 | length 3258.6
  Top Layer w10: DZ6.1@2713.58,257.87 2713.58,312.22 R19.1
  Top Layer w20: U8.3 U8.4 ; R19.1 2752.95,417.32 v2@2774.61,438.98
  Top Layer w25: U8.4 2352.95,770.28 2424.21,841.54 2786.42,841.54 v2(2829.72,798.23) ; Q6.3 3567.32,674.8 3726.38,515.75 3726.38,100.39 3675.2,49.21 3554.13,49.21 3515.04,88.3 DZ5.1 3544.14,167.88 R18.1
  Bottom Layer w25: v2(2775,439.37) 2809.06,473.43 ; v2(2829.72,798.23) 2829.72,494.09 2809.06,473.43 ; Q6.3 3249.61,674.8 3181.1,606.3 3181.1,502.95 3151.57,473.43 2809.06,473.43
NetC9_2: C9.2 R3.1 SW1.1 U.7 | length 951.9
  Top Layer w10: C9.2 120.08,1556.78 v1(120.08,1598.43) 106.85,1611.65 R3.1 ; U.7 690.47,1606.62 v1(698.66,1598.43)
  Bottom Layer w10: SW1.1 163.11,1555.39 v1(120.08,1598.43) 444.88,1598.43 479.33,1563.98 664.21,1563.98 v1(698.66,1598.43)
NetC12_2: C12.2 U.6 Y.1 | length 434.7
  Top Layer w10: U.6 670.78,1589.34 709.96,1550.16 C12.2 709.96,1473.11 808.07,1375 Y.1@885.12,1375
NetC13_2: C13.2 U.5 Y.2 | length 347.1
  Top Layer w10: Y.2@539.37,1375 613.31,1448.94 C13.2 613.31,1521.07 651.1,1558.85 U.5
NetC16_1: C16.1 D1.2 U1.8 | length 283.1
  Top Layer w10: U1.8@2313.06,1482.41 U1.8
  Top Layer w20: U1.8@2313.06,1482.41 2313.06,1541.9 2345.96,1574.8 D1.2
  Top Layer w25: U1.8 2434.17,1472.64 C16.1
NetC16_2: C16.2 DZ2.1 HD3.1 Q3.3 Q6.2 R12.1 U1.6 | length 4276.7
  Top Layer w25: U1.6 2433.46,1372.64 C16.2 2448.82,1174.21 2503.94,1119.09 2845.36,1119.09 2953.53,1227.26 3300.3,1227.26 3320.87,1206.69 Q3.3 ; Q6.2 3271.65,574.8 3211.61,634.84 3211.61,1067.91 3284.65,1140.94 Q3.3 ; R12.1 3762.09,1178.77 DZ2.1 3724.27,1140.94 Q3.3
  Top Layer w40: HD3.1 2072.51,113.51 2138.78,47.24 3098.43,47.24 3170.28,119.09 3170.28,470.47 3239.17,539.37 ; 3242.62,545.77 3271.65,574.8
NetC17_1: C17.1 D2.2 U2.8 | length 301.4
  Top Layer w20: D2.2 1665.35,1572.68 1649.61,1556.93 U2.8 C17.1@1813.4,1472.64
NetC17_2: C17.2 DZ3.1 HD3.2 Q2.3 Q5.2 R13.1 U2.6 | length 3659.3
  Top Layer w10: C17.2@1843.5,1342.64 1881.44,1342.64 ; R13.1@2260.83,908.27 R13.1@2266.93,914.37
  Top Layer w25: U2.6 1718.52,1372.64 1748.52,1342.64 C17.2@1813.4,1342.64 ; 1881.44,1342.64 2049.21,1174.87 2049.21,923.23 2122.05,850.39 2196.3,850.39 R13.1 ; R13.1@2266.93,914.37 DZ3.1 3000.2,914.37 Q2.3 Q2.3@3029.53,928.15
  Top Layer w40: HD3.2 2481.3,185.04 2535.06,238.8 2535.06,652.19 2581.69,698.82 2865.16,698.82 2895.67,729.33 2895.67,794.29 Q2.3@3029.53,928.15 ; Q5.2 3116.61,574.8 3142.72,600.91 3142.72,881.89 3080.91,943.7 Q2.3
NetC21_1: C21.1 U8.6 | length 105.4
  Top Layer w10: C21.1 2152.83,589.29 U8.6
NetCC_1: CC.1 Uxl.4 | length 514.5
  Top Layer w25: Uxl.4 3417.32,1593.5 3426.18,1602.36 CC.1
NetCFF_1: CFF.1 R1xl.1 R2xl.2 Uxl.2 | length 1951.8
  Top Layer w10: CFF.1 2187.19,1998.19 R2xl.2 R1xl.1 2235.27,1893.23 2316.41,1893.23 2327.76,1881.89 2327.76,1768.7 2401.57,1694.88 2478.35,1694.88 2585.63,1587.6 2585.63,1268.94 2620.31,1234.25 2763.78,1234.25 2892.72,1363.19 3268.7,1363.19 3283.46,1377.95 Uxl.2
NetD3_1: D3.1 HD4.2 Q1.TAB | length 805
  Top Layer w25: Q1.TAB 264.96,753.74 342.52,676.18 v2(342.52,416.34)
  Bottom Layer w25: v2(342.52,416.34) 445.72,416.34 D3.1 538.51,323.55 HD4.2
NetD4_1: D4.1 HD5.2 Q4.TAB | length 801.2
  Top Layer w25: Q4.TAB 765.75,787.81 v2(765.75,413.39)
  Bottom Layer w25: v2(765.75,413.39) 880.91,413.39 918.83,375.46 D4.1 971.51,299.44 HD5.2
NetD5_1: D5.1 HD6.2 Q7.TAB | length 775.9
  Top Layer w25: Q7.TAB 1208.66,819.87 v2(1208.66,412.4)
  Bottom Layer w25: v2(1208.66,412.4) 1301.08,412.4 D5.1 1404.51,308.96 HD6.2
NetD6_1: D6.1 HD7.2 Q8.TAB | length 772.6
  Top Layer w25: v2(1641.73,417.32) 1632.87,426.18 1632.87,789.49 Q8.TAB
  Bottom Layer w25: v2(1641.73,417.32) 1647.64,411.42 1699.97,411.42 D6.1 1837.51,273.88 HD7.2
NetD_C: D.C L1.1 Uxl.3 | length 969.7
  Top Layer w25: D.C 2756.89,1379.92 2861.22,1484.25 2975.39,1484.25 3072.83,1581.69 ; L1.1 3082.68,1591.54 3072.83,1581.69 ; Uxl.3 3350.39,1502.95 3271.65,1581.69 3072.83,1581.69
NetDZ1_2: DZ1.2 Q1.1 R7.1 R8.1 | length 490.4
  Top Layer w10: Q1.1 363.5,1065.47 v1(399.45,1029.53)
  Bottom Layer w10: v1@398.62,1032.48 398.62,1011.63 DZ1.2@433.88,976.38 ; R7.1 437.28,961.16 DZ1.2 DZ1.2@433.88,976.38 ; R8.1 433.88,1079.28 DZ1.2@433.88,976.38
NetDZ2_2: DZ2.2 Q3.1 R10.1 R12.2 | length 879.2
  Top Layer w25: Q3.1 3760.83,940.94 3854.33,1034.45 DZ2.2@3854.33,1152.62 ; R10.1 3857.01,1324.87 DZ2.2
NetDZ3_2: DZ3.2 Q2.1 R11.2 R13.2 | length 1010.9
  Top Layer w10: R11.2 2165.87,1004.92 R13.2 ; R13.2@2259.33,1006.42 2295.24,1042.32 DZ3.2 2423.23,981.3 2798.23,981.3 2960.63,1143.7 Q2.1 ; Q2.1@2994.09,1133.86 Q2.1@3019.68,1108.27
NetDZ4_2: DZ4.2 Q4.1 R14.1 R15.1 | length 500
  Top Layer w10: Q4.1 868.32,1028.54 v1(872.87,1028.54)
  Bottom Layer w10: v1@872.05,1031.5 872.05,1010.38 DZ4.2@906.05,976.38 ; R14.1 908.03,962.59 DZ4.2 DZ4.2@906.05,976.38 ; R15.1 906.05,1079.28 DZ4.2@906.05,976.38
NetDZ5_2: DZ5.2 Q6.1 R16.1 R18.2 | length 618.1
  Top Layer w25: Q6.1 3581.3,474.8 3642.99,413.11 DZ5.2
NetDZ6_2: DZ6.2 Q5.1 R17.2 R19.2 | length 803.7
  Top Layer w20: R17.2 2842.95,128.39 DZ6.2@2842.95,246.06
  Top Layer w25: R17.2 2839.57,574.8 2939.57,674.8 Q5.1
NetDZ7_2: DZ7.2 Q7.1 R21.1 R22.1 | length 510.5
  Top Layer w10: Q7.1@1291.97,1079.92 v1(1335.47,1036.42)
  Bottom Layer w10: v1@1334.65,1039.37 1334.65,1019.95 DZ7.2@1378.22,976.38 ; R21.1 1375.98,962.33 DZ7.2 DZ7.2@1378.22,976.38 ; R22.1 1378.22,1079.28 DZ7.2@1378.22,976.38
NetDZ8_2: DZ8.2 Q8.1 R24.1 R25.1 | length 527.4
  Top Layer w10: Q8.1 1783.27,1079.92 v1(1800.2,1062.99)
  Bottom Layer w10: v1(1800.2,1062.99) 1800.2,1026.57 DZ8.2@1850.39,976.38 ; R24.1 1850.94,975.83 DZ8.2@1850.39,976.38 ; R25.1 1850.39,1079.28 DZ8.2@1850.39,976.38
NetJP1_2: JP1.2 U.15 | length 2037.5
  Top Layer w10: U.15 951.57,1771.46 1025.59,1845.47 v1(1118.11,1845.47)
  Bottom Layer w10: v1(1118.11,1845.47) 1136.81,1845.47 1444.88,2153.54 2083.66,2153.54 2119.09,2188.98 2119.09,2300.2 2142.72,2323.82 2470.19,2323.82 JP1.2
NetJP2_2: JP2.2 U.14 | length 1592
  Top Layer w10: U.14 968.31,1751.77 1010.83,1794.29 v1(1125.98,1794.29)
  Bottom Layer w10: v1(1125.98,1794.29) 1162.4,1794.29 1473.11,2105 2100,2105 JP2.2
NetJP3_2: JP3.2 U.11 | length 1542.4
  Top Layer w10: U.11 769.21,1641.23 785.43,1625 941.45,1625 963.1,1646.65 v1(1034,1646.65)
  Bottom Layer w10: v1(1034,1646.65) 1034,1825.93 1390.16,2182.09 1850.67,2182.09 JP3.2
NetJP4_1: JP4.1 U.32 | length 1492.7
  Top Layer w10: U.32 651.1,2087.09 556.1,2182.09 556.1,2281.5 589.61,2315 1620,2315 JP4.1
NetJP5_2: JP5.2 U.21 | length 661.5
  Top Layer w10: U.21 1136.61,1889.57 1160,1912.95 JP5.2
NetJP5_3: JP5.3 U.22 | length 644
  Top Layer w10: U.22 1111.02,1909.25 1130.71,1928.94 1130.71,2179.29 JP5.3
NetJP6_2: JP6.2 U.30 | length 263.6
  Top Layer w10: U.30 690.47,2102.73 735.24,2147.5 JP6.2
NetJP6_3: JP6.3 U.31 | length 259.8
  Top Layer w10: JP6.3 635.24,2136.74 670.78,2101.2 U.31
NetJP7_1: JP7.1 U.29 | length 2689.1
  Top Layer w10: U.29 710.15,2088.11 749.02,2126.97 v1(771.65,2126.97) ; v1@935.24,2340.55 942.13,2333.66 2996.06,2333.66 3082.6,2247.13 JP7.1
  Bottom Layer w10: v1(771.65,2126.97) 773.62,2125 861.22,2125 934.1,2197.88 v1(934.1,2339.57)
NetJP8_2: JP8.2 U.37 | length 384.1
  Top Layer w10: JP8.2 158.49,1901.57 251.97,1901.57 299.02,1948.62 U.37
NetJP8_4: JP8.4 U.34 | length 536.2
  Top Layer w10: JP8.4 167.91,2110 555.35,2110 611.73,2053.63 U.34
NetLED1_1: LED1.1 R4.1 | length 94.4
  Top Layer w10: R4.1@1517.4,1896.49 LED1.1
NetLED2_1: LED2.1 R5.1 | length 81
  Top Layer w10: LED2.1 321.85,1542.32 R5.1
NetLED2_2: LED2.2 U.2 | length 268.9
  Top Layer w10: LED2.2 442.08,1540.35 501.53,1599.81 568.31,1599.81 592.04,1623.54 U.2
NetLED3_1: LED3.1 U3.2 | length 236.6
  Top Layer w10: LED3.1 560.51,760.75 U3.2
NetLED3_2: LED3.2 U.42 | length 1824.8
  Top Layer w10: LED3.2 505.59,1100.43 458.39,1147.64 69.88,1147.64 17.72,1199.8 17.72,1692.91 54.13,1729.33 202.76,1729.33 222.04,1748.62 222.04,1824.41 247.83,1850.2 U.42
NetLED4_1: LED4.1 U4.2 | length 223.2
  Top Layer w10: LED4.1 995.51,793.24 U4.2
NetLED4_2: LED4.2 U.43 | length 2254.3
  Top Layer w10: U.43 263.58,1830.51 245.08,1812.01 245.08,1743.11 203.74,1701.77 62.99,1701.77 37.4,1676.18 37.4,1208.66 76.77,1169.29 953.03,1169.29 973.09,1149.24 LED4.2
NetLED5_1: LED5.1 U5.2 | length 227.2
  Top Layer w10: U5.2 1440.58,616.84 LED5.1
NetLED5_2: LED5.2 U.45 | length 2304.5
  Top Layer w10: U.45 277.36,1791.14 264.96,1778.74 264.96,1711.81 247.05,1693.9 247.05,1217.52 273.62,1190.94 1423.23,1190.94 1440.58,1173.59 LED5.2
NetLED6_1: LED6.1 U6.2 | length 244.8
  Top Layer w10: U6.2 1908.07,659.33 LED6.1
NetLED6_2: LED6.2 U.46 | length 2687.9
  Top Layer w10: U.46 305.91,1771.46 283.46,1749.02 283.46,1694.88 270.08,1681.5 270.08,1247.36 304.84,1212.6 1446.59,1212.6 1461.35,1197.83 1887.8,1197.83 1908.07,1177.56 LED6.2
NetLED7_1: LED7.1 R1.1 | length 110.3
  Top Layer w10: LED7.1 1979.33,1989.89 R1.1
NetR6_1: R6.1 U3.1 | length 185.3
  Bottom Layer w10: R6.1 459.92,589.29 547.44,501.77 U3.1
NetR7_2: R7.2 U3.3 | length 329.6
  Bottom Layer w10: U3.3 314.26,655.51 452.47,655.51 R7.2
  Bottom Layer w25: U3.3 U3.3@270.08,601.77
NetR9_1: R9.1 U4.1 | length 186
  Bottom Layer w10: R9.1 907.99,589.29 U4.1
NetR10_2: R10.2 U1.7 | length 1750
  Top Layer w20: U1.7 2500.59,1422.64 2518.7,1404.53 2518.7,1187.01 2552.17,1153.54 2804.13,1153.54 2924.21,1273.62 3643.2,1273.62 3701.34,1331.76 R10.2
NetR11_1: R11.1 U2.7 | length 905.3
  Top Layer w25: U2.7 1719.09,1422.64 1723.43,1418.31 v2(1727.36,1418.31) ; v2(2095.47,1187.99) 2095.47,933.83 2112.88,916.42 R11.1
  Bottom Layer w25: v2(1727.36,1418.31) 1761.81,1383.86 1761.81,1329.35 1805.73,1285.43 1998.03,1285.43 v2(2095.47,1187.99)
NetR14_2: R14.2 U4.3 | length 354.5
  Bottom Layer w10: U4.3 753.19,659.45 930.12,659.45 R14.2
NetR16_2: R16.2 U1.4 | length 2571.4
  Top Layer w25: U1.4 2191.23,1322.64 2464.65,1049.21 v1(2687.01,1049.21) ; v1(3343.5,121.06) 3382.87,121.06 3486.22,224.41 3486.22,324.8 3515.75,354.34 R16.2
  Bottom Layer w25: v1(2687.01,1049.21) 2687.01,181.1 2747.05,121.06 v1(3343.5,121.06)
NetR17_1: R17.1 U2.4 | length 2273.9
  Top Layer w10: U2.4 1543.11,1240.16 v2(1594.49,1240.16) ; v2(2618.11,409.45) 2618.11,189.96 2683.07,125 R17.1
  Bottom Layer w10: v2(1594.49,1240.16) 1983.92,1240.16 2120.74,1103.35 2539.37,1103.35 2618.11,1024.61 v2(2618.11,409.45)
NetR20_1: R20.1 U5.1 | length 178.7
  Bottom Layer w10: R20.1 1327.99,589.29 U5.1
NetR21_2: R21.2 U5.3 | length 397.5
  Bottom Layer w10: U5.3 1191.07,667.32 1410.87,667.32 R21.2
NetR23_1: R23.1 U6.1 | length 169.3
  Bottom Layer w10: R23.1 1752.99,589.29 U6.1
NetR24_2: R24.2 U6.3 | length 445
  Bottom Layer w10: U6.3 1608.19,659.45 1883.86,659.45 R24.2
NetU1_1: U1.1 U.13 | length 1437.9
  Top Layer w10: U.13 1170.21,1732.09 1250.73,1651.57 1866.14,1651.57 1926.18,1591.54 1926.18,1520.25 1973.79,1472.64 U1.1
NetU2_1: U2.1 U.12 | length 755.9
  Top Layer w10: U.12 1166.73,1675.79 1369.88,1472.64 U2.1
NetU8_7: U8.7 U.10 | length 2961.1
  Top Layer w10: U.10 749.52,1633.35 776.26,1606.62 953.07,1606.62 969.49,1623.03 1003.54,1623.03 1057.67,1568.9 v1(1153.54,1568.9) ; U8.7 2223.82,534.06 2255.91,501.97 v1(2255.91,435.04)
  Bottom Layer w10: v1(1153.54,1568.9) 1381.62,1340.82 1381.62,1232.56 1424.21,1189.96 1951.77,1189.96 2049.21,1092.52 2049.21,750.98 2087.8,712.4 2370.02,712.4 2428.15,654.28 2428.15,455.71 2407.48,435.04 v1(2255.91,435.04)
pads on no net: U1.2 U2.2 U7.4 U.1 U.3 U.4 U.16 U.17 U.18 U.19 U.20 U.25 U.26 U.27 U.28 U.33 U.38 U.39 U.40 U.41 U.44 Uxl.3.1
copper on no net:
  other v3: 3838.58,98.46 90,100 90,2265 3840,2265

## Polygon pours and split planes (outlines as drawn)
GND on Bottom Layer "Bottom Layer-GND" (solid, remove dead copper, pour order 41): 0,0 3937.01,0 3937.01,2362.2 0,2362.2
GND on Bottom Layer "GND_L02_P022" (solid, remove dead copper, pour order 22): 3472.44,2300.2 3473.43,2299.21 3734.25,2299.21 3734.25,1756.89 3733.27,1755.91 3789.37,1755.91 3789.37,1675.79 3788.98,1676.18 3576.77,1676.18 3576.77,2039.72 3475.39,2141.1 3475.39,2299.21 3474.41,2300.2
12V on Bottom Layer "12V_L02_P018" (solid, remove dead copper, pour order 18): 3458.17,1512.3 3689.47,1512.3 3689.47,1360.73 3682.58,1353.84 3680.61,1355.81 3458.17,1355.81
5V on Top Layer "5V_L01_P040" (solid, remove dead copper, pour order 40): 2754.92,1606.3 2755.91,1605.32 2851.38,1605.32 2851.38,2061.02 2841.54,2070.87 2841.54,2079.72 2838.58,2079.72 2826.77,2091.54 2275.59,2091.54 2256.89,2072.83 2251.97,2072.83 2251.97,2061.98 2245.08,2055.09 2251.97,2048.2 2251.97,1985.24 2390.75,1985.24 2396.65,1979.33 2397.64,1980.32 2494.43,1980.31 2561.36,1913.39 2741.14,1913.39 2754.92,1899.61
12V on Top Layer "12V_L01_P038" (solid, remove dead copper, pour order 38): 3281.5,2299.21 3283.46,2301.18 3408.46,2301.18 3408.46,2208.03 3475.39,2141.1 3476.02,2141.73 3868.11,2141.73 3921.26,2080.99 3921.26,1472.44 3852.36,1403.54 3852.82,1404 3616.6,1403.54 3616.14,1404 3619.09,1406.96 3619.09,1509.84 3775.59,1509.84 3807.09,1541.34 3807.09,2028.05 3803.64,2028.05 3746.06,2085.63 3284.65,2085.63 3284.65,2299.02 3283.46,2300.2
GND on Top Layer "GND_L01_P034" (solid, remove dead copper, pour order 34): 767.72,1477.04 1118.11,1479.33 1139.76,1459.65 1139.76,1252.95 1125.98,1227.36 369.09,1227.36 343.5,1255.91 343.5,1493.11 359.25,1493.11 445.87,1493.11 491.31,1553.67 545.59,1553.67 545.59,1485.24 515.02,1485.24 513.59,1486.67 496.41,1469.49 397.64,1469.49 397.64,1255.91 411.42,1242.13 1076.57,1242.13 1076.57,1451.77 767.72,1451.77
GND on Top Layer "GND_L01_P030" (solid, remove dead copper, pour order 30): 912.4,1574.81 911.41,1573.82 767.72,1573.82 767.72,1462.6 768.7,1461.61 771.65,1464.57 912.4,1461.61
GND on Top Layer "GND_L01_P024" (solid, remove dead copper, pour order 24): 3578.74,1982.13 3734.25,1982.13 3734.25,1762.8 3742,1755.91 3789.37,1755.91 3789.37,1675.79 3788.98,1676.18 3578.74,1676.18
12V on Top Layer "12V_L01_P020" (solid, remove dead copper, pour order 20): 3462.11,1513.26 3693.41,1513.26 3693.41,1356.76 3462.11,1356.76

## Silkscreen, mask and mechanical layers (free items; w line width, h text height)
Bottom Overlay:
  drawing of 1136 lines, arcs and shapes, not listed
  text "Designed by / Doan Ngoc Thanh Tu" at 919.72,1689.65 h60
Top Solder:
  region: 2274.61,204.72 2269.68,209.65 2258.86,198.82 2238.19,198.82 2238.19,179.13 2258.86,158.46 2318.9,158.46 2325.79,165.35 2489.17,165.35 2554.01,230.19 2554.01,262.67 2555.12,263.78 2555.12,644.45 2590.55,679.88 2590.55,680.12 2872.05,680.12 2873.03,679.13 2915.35,721.46 2915.35,785.43 3030.51,900.59 3030.51,905.51 3057.97,932.97 3057.97,964.57 3028.54,964.57 3020.18,956.2 3004.43,956.2 3004.43,934.55 2967.52,897.64 2967.52,893.7 2875.98,802.17 2875.98,738.19 2856.3,718.5 2574.33,718.5 2511.81,655.99 2511.81,243.11 2473.43,204.72
  region: 3028.54,964.57 3087.4,964.57 3161.42,890.55 3161.42,613.19 3123.54,575.31 3123.54,555.12 3043.92,555.12 3018.73,555.12 3011.81,562.04 3009.84,566.93 3009.84,583.66 3020.67,594.49 3108.77,594.49 3123.54,609.25 3123.54,639.29 3133.86,649.61 3123.54,659.93 3123.54,819.38 3123.54,869.57 3064.96,928.15 3017.72,928.15 2997.05,948.82 3011.81,963.58 3024.61,963.58
  region: 3225.39,639.76 3225.39,1066.93 3232.28,1073.82 3232.28,1074.8 3235.24,1074.8 3273.62,1113.19 3273.62,1115.16 3332.68,1115.16 3343.5,1125.98 3342.52,1126.97 3342.52,1158.46 3337.6,1158.46 3328.74,1167.32 3279.53,1167.32 3260.83,1148.62 3260.83,1133.86 3199.53,1072.56 3199.53,821.26 3199.53,630.2 3254.92,574.8 3271.65,574.8 3271.65,593.5
  region: 2150.59,64.96 2149.61,64.96 2092.52,122.05 2104.33,133.86 2104.33,204.72 2095.47,204.72 2077.76,222.44 2074.8,219.49 2050.2,219.49 2050.2,198.82 2051.57,197.44 2051.57,108.34 2131.37,28.54 3106.3,28.54 3189.96,112.2 3189.96,119.09 3189.96,460.63 3281.5,552.17 3292.32,541.34 3361.22,541.34 3361.22,592.52 3364.17,595.47 3357.28,602.36 3337.6,602.36 3334.65,605.32 3324.8,595.47 3265.75,595.47 3177.17,506.89 3159.53,506.89 3159.53,502.83 3140.75,484.06 3151.38,473.43 3151.38,128.26 3098.23,75.12 2989.17,75.12 2975,75.12 2139.14,75.12 2112.88,101.38
  region: 3288.75,2301.18 3408.46,2301.18 3408.46,2208.03 3474.76,2141.73 3868.11,2141.73 3921.26,2088.58 3921.26,1472.44 3852.82,1404 3692.91,1404 3693.41,1403.51 3693.41,1356.76 3462.11,1356.76 3462.11,1513.26 3772.18,1513.26 3807.09,1548.17 3807.09,2024.61 3746.06,2085.63 3393.9,2085.63 3284.65,2085.63 3284.65,2296.06 3281.5,2299.21
  lines w10: 3342.52,2187.99 3342.52,2234.25
Bottom Solder:
  region: 2841.54,485.24 3030.51,485.24 3034.45,489.17 3050.2,473.43 3050.2,463.58 3044.29,457.68 3039.37,462.6 2814.96,462.6 2793.31,440.94 2793.31,437.99 2784.45,437.99 2760.83,414.37 2760.83,442.91 2817.91,500 2817.91,792.32 2776.57,833.66 2773.62,830.71 2430.12,830.71 2364.17,764.76 2392.72,568.9 2312.8,568.9 2312.8,645.67 2338.58,773.38 2419.53,854.33 2791.34,854.33 2841.54,804.13
  region: 3254.92,662.16 3337.2,662.4 3324.8,674.8 3324.8,688.98 3319.88,693.9 3312.99,687.01 3243.6,687.01 3168.31,611.71 3168.31,506.93 3146.68,485.24 3067.72,485.24 3064.76,488.19 3035.43,488.19 3027.56,496.06 3019.69,488.19 3014.76,488.19 3014.76,480.31 3008.86,474.41 3018.7,464.57 3018.7,456.69 3045.28,456.69 3050.2,461.61 3126.97,461.61 3143.7,446.85 3194.8,497.95 3194.8,601.3 3254.92,661.42
  region: 3569.39,1355.81 3565.94,1352.36 3565.94,1060.04 2976.38,1060.04 2965.53,1049.19 2965.53,1041.97 2969.84,1041.97 2988.19,1023.62 3563.98,1023.62 3569.88,1017.72 3569.88,176.18 3466.54,72.83 1777.25,72.83 1777.25,75.12 1643.7,208.66 1623.03,208.66 1613.19,198.82 1618.11,193.9 1618.11,174.21 1717.52,74.8 1717.52,72.83 1281.5,72.83 1227.36,126.97 1227.36,201.77 1214.57,214.57 1187.01,214.57 1176.18,203.74 1176.18,166.34 1183.07,159.45 1181.1,157.48 1181.1,124.02 1230.32,74.8 911.42,74.8 911.42,75.79 774.61,212.6 754.92,212.6 740.16,197.83 740.16,177.17 742.13,177.17 842.52,76.77 472.44,76.77 399.21,150.01 399.21,151.25 347.7,202.76 320.87,202.76 320.87,192.91 310.04,182.09 334.65,157.48 334.65,150.59 339.57,150.59 456.69,33.46 3483.27,33.46 3483.27,34.17 3587.88,138.78 3598.7,138.78 3598.7,153.55 3612.2,167.05 3609.25,170 3609.25,1358.27 3691.9,1358.27 3693.41,1356.76 3693.41,1513.26 3462.11,1513.26 3462.11,1356.76

## Text inside footprints (layer, text, board x,y; h text height)
COUT: Top Overlay "+" at 2596.46,2004.92 h35 r270